# Altium PCB USBSticker01-02.PcbDoc
Units mm, origin at the board's own origin, x right, y up, seen from the top; angles counter-clockwise.
Board outline 22 x 85 mm, 2 copper layers (Top Layer, Bottom Layer); 24 components, 24 nets, 98 pads, 29 vias.
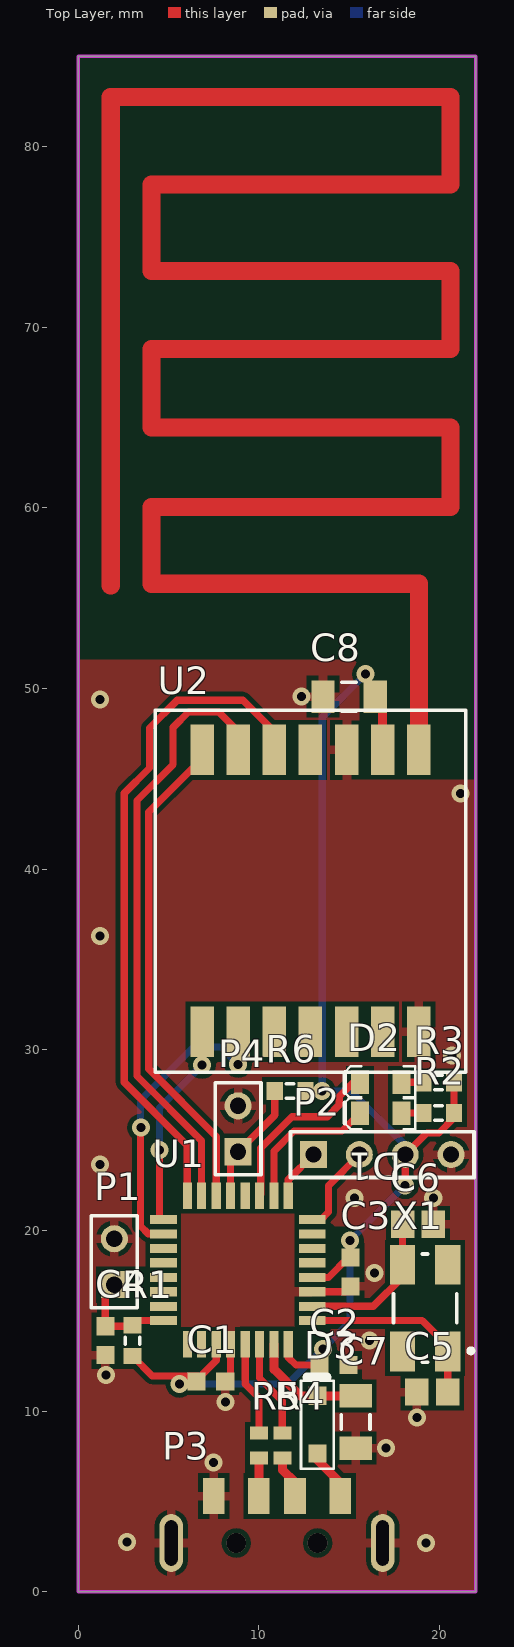
[diagram p0: Top Layer view]
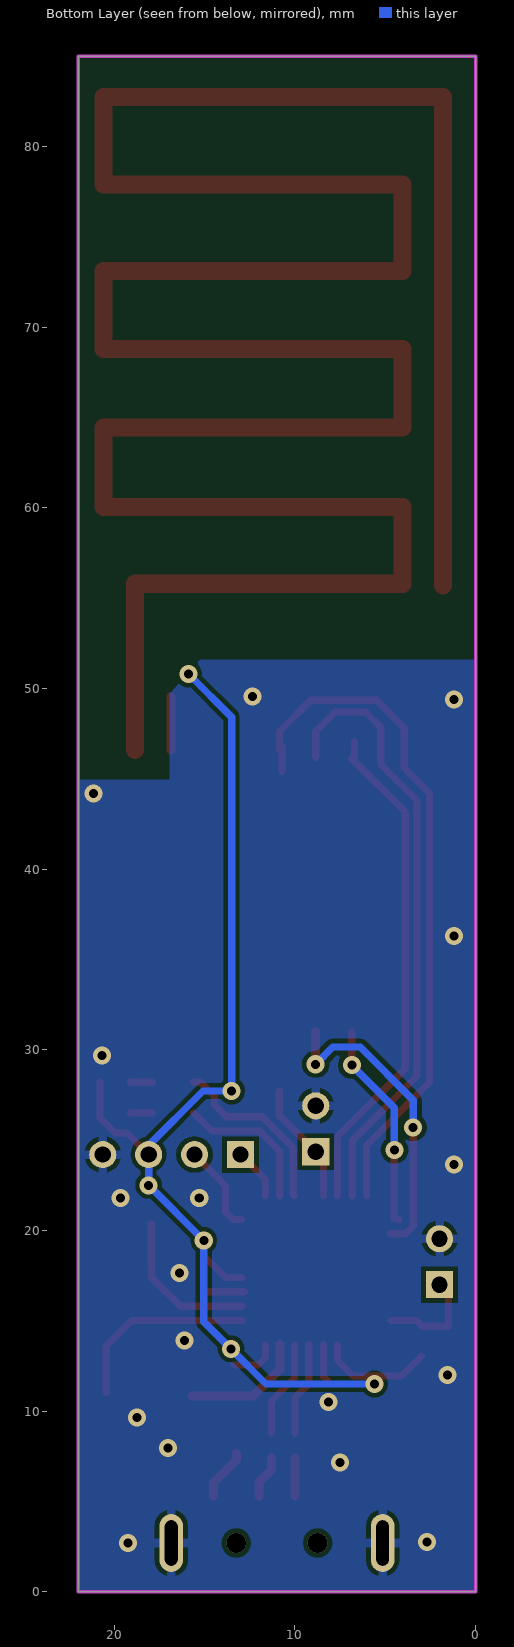
[diagram p1: Bottom Layer view, seen from below]
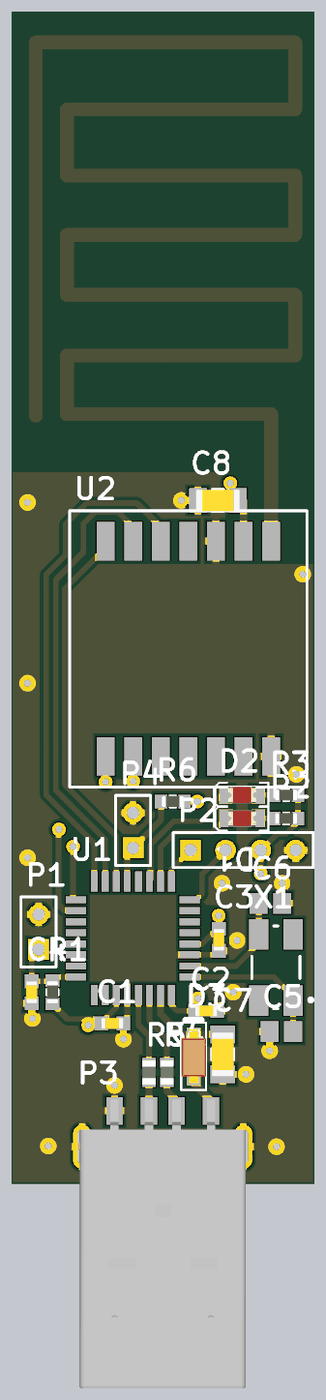
[diagram p2: 3D render of the assembled board from above, using the file's embedded part models]

## Layer stack, top to bottom
Top Solder: solder mask 0.0102, Solder Resist, Dk 3.5
Top Layer: signal copper 0.0356
Dielectric1: dielectric 0.32, FR-4, Dk 4.8
Bottom Layer: signal copper 0.0356
Bottom Solder: solder mask 0.0102, Solder Resist, Dk 3.5

## Board outline
0,0 0,85 22,85 22,0

## Design rules (kind name [scope] priority, off if disabled: settings)
Clearance KeepOut [InPolygon vs OnLayer('Keep-Out Layer')] p1: gap=0.01
Clearance [All] p2: gap=0.25
FabricationTestPointUsage TestPointUsage [All] p1: valid=0 allowmultiple=FALSE
FabricationTestpoint Testpoint [All] p1: side=3 testpointundercomponent=TRUE minsize=1.016 maxsize=2.54 preferedsize=1.524 minholesize=0 maxholesize=1.016 preferedholesize=0.813 testpointgrid=0.025 allowsidetop=TRUE allowsidebottom=TRUE usegrid=TRUE gridtolerance=0
HoleSize [All] p1: absolutevalues=TRUE maxlimit=6 minlimit=0.025 maxpercent=80.000 minpercent=20.000
PolygonConnect PolygonConnect_1 [All vs IsVia] p1: connectstyle=Direct reliefconductorwidth=0.254 reliefentries=4 polygonreliefangle="90 Angle" airgapwidth=0.254
PolygonConnect [All] p2: connectstyle=Relief reliefconductorwidth=0.5 reliefentries=4 polygonreliefangle="90 Angle" airgapwidth=0.254
RoomDefinition USBSticker01-01 [InComponentClass('USBSticker01-01')] p1: confinementstyle=ConfineIn formatcopy=TRUE lockcomponents=FALSE outline -7.25,-15.95 30,-15.95 30,88.3 -7.25,88.3
RoutingVias [All] p1: holewidth=0.711 width=1.27 viastyle="Through Hole" minholewidth=0.711 minwidth=1.27 maxholewidth=0.711 maxwidth=1.27
SilkToSolderMaskClearance SilkscreenOverComponentPads [IsPad] p1 off: minsilkscreentomaskgap=0.254 clearancetoexposedcopper=TRUE
SolderMaskExpansion [All] p1: expansion=0.102
Width [All] p1: maxlimit=2 minlimit=0.25 preferedwidth=0.4
26 further rules are at their usual default settings.

## Components (designator, comment, footprint, x,y, rotation, side; value= is the part's Value field where it differs from the comment)
C1 "1uF" CAPC1608N 7.339,11.65 r180 top
C2 "150nF" CAPC1608N 14.15,12.55 r180 top
C3 "150nF" CAPC1608N 15.073,17.7 r90 top
C4 "10pF" CAPC1608N 1.5,13.9 r90 top
C5 "18pF" CAPC2012N 19.6,11.05 r0 top
C6 "18pF" CAPC2012N 18.804,20.347 r180 top
C7 "10uF" CAPC3216N 15.35,9.4 r90 top (schematic designator C6)
C8 "10uF" CAPC3216N 15,49.55 r0 top
D1 "KPT-2012QBC-D" D0805 16.75,26.5 r180 top
D2 "KPT-2012QBC-D" D0805 16.75,28.199 r180 top
D3 "BAT42W" SOD123 13.25,9.25 r270 top
P1 "Header 2" HDR1X2 2,17 r270 top
P2 "Header 4" HDR1X4 13.02,24.2 r0 top
P3 "48037-2200" "MOLEX 48037-2200" 11,2.7 r0 top
P4 "Header 2" HDR1X2 8.85,24.36 r270 top
R1 "10k" RESC1608N 3,13.9 r270 top
R2 "150R" RESC1608N 19.95,26.5 r0 top
R3 "150R" RESC1608N 19.95,28.199 r0 top
R4 "22R" RESC1608X50N 11.3,8.09 r90 top
R5 "22R" RESC1608X50N 10,8.09 r90 top
R6 "10k" RESC1608N 11.725,27.724 r0 top
U1 "AT90USB162-16AU" QFP80P900X900X120-32N 8.835,17.807 r180 top locked
U2 "ALPHA-TRX433S" ALPHA-TRX 12.854,38.8 r0 top locked
X1 "8 MHz" 2SMX-3SMXB 19.2,15.7 r90 top

## Footprints (in the part's own frame and the unit in brackets; to place one, negate y for a bottom-side part, rotate by r counter-clockwise, add the part's x,y. Pads: shape width x height; smd on the part's side, far side on the other; paste and mask are expansions set on the pad)
2SMX-3SMXB [mm] "Quartz Crystal, SM; Body 6.0 x 3.5 mm (LxW)"
  rect 2.2x1.4 smd: 1(-2.4,-1.25) 2(2.4,-1.25) 3(2.4,1.25) 4(-2.4,1.25)
  silkscreen extent -3,-2.66 3,1.75, body extent -3.01,-1.76 3.01,1.76, height 1
ALPHA-TRX [mm] "ALPHA RF MODULES"
  rect 1.3x2.8 smd: 1(-6,-7.8) 2(-4,-7.8) 3(-2,-7.8) 4(0,-7.8) 5(2,-7.8) 6(4,-7.8) 7(6,-7.8) 8(6,7.8) 9(4,7.8) 10(2,7.8) 11(0,7.8) 12(-2,7.8) 13(-4,7.8) 14(-6,7.8)
  silkscreen extent -8.6,-10.03 8.6,10, body extent -8.05,-7.95 8.05,7.95, height 4
CAPC1608N [mm] "Chip Capacitor, Body 1.6x0.8mm(0603), IPC Medium Density"
  rect 1x1 smd: 1(-0.8,0) 2(0.8,0)
  body extent -0.8,-0.4 0.8,0.4, height 0.55
CAPC2012N [mm] "Chip Capacitor, Body 2.0x1.3mm(C0805), IPC Medium Density"
  rect 1.3x1.5 smd: 1(-0.85,0) 2(0.85,0)
  body extent -1.1,-0.73 1.1,0.73, height 1.1
CAPC3216N [mm] "Chip Capacitor, Body 3.2x1.6mm, IPC Medium Density"
  rect 1.3x1.8 smd: 1(-1.45,0) 2(1.45,0)
  silkscreen extent -0.4,-0.8 0.4,0.8, body extent -1.6,-0.8 1.6,0.8, height 0.7
D0805 [mm]
  rect 1x1.3 smd paste-0.02 mask+0.05: 1(-1.15,0) 2(1.15,0)
  silkscreen extent -1.91,-0.89 2,0.89, body extent -1.01,-0.62 1.01,0.63, height 1.1
HDR1X2 [mm] "Connector; Header; 2 Position"
  rect 1.5x1.5 hole 0.9: 1(0,0)
  round 1.5 hole 0.9: 2(-2.54,0)
  silkscreen extent -3.81,-1.27 1.27,1.27
HDR1X4 [mm] "Connector; Header; 4 Position"
  rect 1.5x1.5 hole 0.9: 1(0,0)
  round 1.5 hole 0.9: 2(2.54,0) 3(5.08,0) 4(7.62,0)
  silkscreen extent -1.27,-1.27 8.89,1.27
"MOLEX 48037-2200" [mm]
  rect 1.2x2 smd: 1(3.5,2.6) 2(1,2.6) 3(-1,2.6) 4(-3.5,2.6)
  oval 1.3x3.2 hole 0.7 slot 2.5 at 90 deg: 4(-5.85,0) 4(5.85,0)
  body extent -6.02,-17.52 6.02,3.43, height 2.25
QFP80P900X900X120-32N [mil]
  rect 58x20 smd paste-1000 mask-1000: 1(-162,110) 2(-162,79) 3(-162,47) 4(-162,16) 5(-162,-16) 6(-162,-47) 7(-162,-79) 17(162,-110) 18(162,-79) 19(162,-47) 20(162,-16) 21(162,16) 22(162,47) 23(162,79) 24(162,110)
  rect 57.99x20 smd paste-1000 mask-1000: 8(-162,-110)
  rect 20x58 smd paste-1000 mask-1000: 9(-110,-162) 10(-79,-162) 11(-47,-162) 12(-16,-162) 13(16,-162) 14(47,-162) 15(79,-162) 16(110,-162) 25(110,162) 26(79,162) 27(47,162) 28(16,162) 29(-16,162) 30(-47,162) 31(-79,162) 32(-110,162)
  body extent -138,-138 138,138, height 39
RESC1608N [mm] "Chip Resistor, Body 1.6x0.8mm, IPC Medium Density"
  rect 0.9x1 smd: 1(-0.85,0) 2(0.85,0)
  silkscreen extent -0.2,-0.4 0.2,0.4, body extent -0.8,-0.4 0.8,0.4, height 0.38
RESC1608X50N [mm] "Chip Resistor, EIA 0603, Metric 1608, Body 1.6x0.8mm, IPC Medium Density"
  rect 0.72x0.99 smd: 1(-0.69,0) 2(0.69,0)
  body extent -0.87,-0.47 0.88,0.48, height 0.5
SOD123 [mm]
  rect 1x1 smd paste-0.02 mask+0.05: 1(1.6,0) 2(-1.6,0)
  silkscreen extent -2.62,-0.91 2.44,0.89, body extent -1.95,-0.9 1.95,0.9, height 1.29

## Part data
C1: library part C0000022, "MLCC, 0603, X6S, 25V, 1uF"
C2 C3: library part C0000001, "MLCC, 150nF 16V -20+80% Y5V"
C4: library part C0000042, "MLCC, 0603, NP0, 50V, 10PF"
C5 C6: library part C0000048, "MLCC, 0805, NPO, 50V, 18pF"
C7 C8: library part C0000011, "MLCC, 10uF 25V -20%, +80% Y5V 1206"
D1 D2: library part D0000005, "LED, SMD, 0805, BLUE, 100mCd"
D3: library part D0000003, "Diode Schottkey, 30V, Vf=1V, If=1A, rrt=5ns, SOD123, -55°C to +125°C"
P1 P4: "Header, 2-Pin"
P2: "Header, 4-Pin"
P3: "SOCKET, USB, PCB, R/A, TYPE A"
R1 R6: library part R0000008, "Res, 10K 0.063W 75V 1%  0603"
R2 R3: library part R2406052, "150R 5% 0603 1/10W"
R4 R5: library part R0000136, "Res, 22R, 0603 (1608 metric), ±1%, 100mW, 75V"
U2: "RF SOLUTIONS  ALPHA-TRX433S  RF MODULE, TRANSCEIVER, FSK, 433MHZ"
X1: library part M0000014, "CRYSTAL, 8M, 18PF CL, 6X3.6MM SMT"

## Via types
v1: diameter 1, hole 0.5, Top Layer to Bottom Layer, 27 vias
v2: diameter 1.1, hole 1.1, Top Layer to Bottom Layer, 2 vias

## Nets (pads, with @x,y where several pads share a name; then routed paths per layer and width w, separated by ;. In a path a pad name is that pad's centre, name@x,y a point inside that pad or via, vN(x,y) a via of type N, cw(c..) or ccw(c..) an arc to the next point about the centre after c; other vN are vias at no path point)
+3.3V: C1.2 C2.2 C3.2 C8.2 P2.3 R1.2 R2.2 R3.2 R6.2 U1.4 U1.27 U1.32 U2.9 | length 73.4
  Top Layer w0.4: R1.2 4.1,11.95 6.787,11.95 7.641,12.804 U1.27 ; U1.32 11.629,12.971 12.05,12.55 C2.2 ; U1.4 13.85,17.4 C3.2@14.95,18.5 ; v1(18.1,22.5) P2.3 19.3,25.4 19.965,25.4 20.8,26.235 R3.2
  Top Layer w0.5: U2.9 C8.2@16.854,49.55
  Bottom Layer w0.4: v1(5.6,11.5) 11.6,11.5 v1(13.55,13.45) 15.05,14.95 v1(15.05,19.45) v1(18.1,22.5) P2.3 18.1,24.718 15.094,27.724 v1(13.503,27.724) 13.503,48.403 v1(15.9,50.8)
+5V: C7.2 D3.2 U1.31 | length 6.8
  Top Layer w0.5: U1.31 10.842,12.308 12.3,10.85 C7.2 C7.2@15.7,10.85
BOOT: P4.1 R6.1 U1.13 | length 6.8
  Top Layer w0.4: U1.13 8.429,23.879 P4.1@8.9,24.35 ; P4.1 10.875,26.385 R6.1
GND: C1.1 C2.1 C3.1 C4.1 C5.1 C6.1 C7.1 C8.1 P1.2 P2.4 P3.4 P4.2 U1.3 U1.28 U2.7 U2.10 | length 4.3
  Top Layer w0.4: C1.1@8.175,11.65 8.429,11.904 U1.28 ; U1.3@12.8,16.613 U1.3 C3.1@14.987,16.613
  other v1: 19.25,2.7 2.7,2.75 7.5,7.15 17.039,7.95 18.75,9.65 8.15,10.5 1.55,12 16.115,13.9 16.394,17.654 15.3,21.8 19.654,21.8 1.2,23.65 20.694,29.691 1.2,36.3 21.15,44.2 1.2,49.4 12.35,49.55
MISO: U1.17 U2.1 | length 11.6
  Top Layer w0.4: U1.17@4.238,20.601 4.491,20.651 4.5,20.66 v1(4.5,24.45) ; v1(6.854,29.15) U2.1
  Bottom Layer w0.4: v1(4.5,24.45) 4.5,26.796 v1(6.854,29.15)
MOSI: U1.16 U2.12 | length 38.6
  Top Layer w0.4: U1.16 6.041,24.709 2.55,28.2 2.55,44.2 3.95,45.6 3.95,47.821 5.479,49.35 9.128,49.35 10.854,47.624 U2.12 ; U2.12@10.704,45.4 U2.12@10.704,46.75
NetC5_2: C5.2 U1.1 X1.1 | length 10.6
  Top Layer w0.4: U1.1 19.037,15.013 20.45,13.6 X1.1 C5.2
NetC6_2: C6.2 U1.2 X1.3 | length 8.6
  Top Layer w0.4: U1.2 16.337,15.8 17.95,17.413 X1.3 17.954,18.104 C6.2
NetD1_1: D1.1 R2.1 | length 1.2
  Top Layer w0.4: D1.1 R2.1
NetD1_2: D1.2 U1.10 | length 8.1
  Top Layer w0.4: U1.10 10.842,24.392 11.95,25.5 14.6,25.5 D1.2
NetD2_1: D2.1 R3.1 | length 1.2
  Top Layer w0.4: D2.1 R3.1
NetD2_2: D2.2 U1.11 | length 10
  Top Layer w0.4: U1.11 10.1,21.992 10.1,24.569 11.831,26.3 13.8,26.3 14.453,26.953 14.453,27.416 15.236,28.199 D2.2
NetD3_1: D3.1 P3.1 | length 2.9
  Top Layer w0.5: D3.1 13.25,7.287 14.5,6.037 P3.1
NetE1_1: U2.8 | length 179.6
  Top Layer w1: 1.8,55.7 1.8,82.75 20.6,82.75 20.6,77.9 4.05,77.9 4.05,73.1 20.6,73.1 20.6,68.8 4.05,68.8 4.05,64.45 20.6,64.45 20.6,60.05 4.05,60.05 4.05,55.8 18.854,55.8 U2.8
NetP3_2: P3.2 R4.1 | length 2.4
  Top Layer w0.5: R4.1 11.3,6.75 12,6.05 P3.2
NetP3_3: P3.3 R5.1 | length 2.1
  Top Layer w0.5: P3.3 R5.1
NIRQ: U1.18 U2.2 | length 17.2
  Top Layer w0.4: v1@3.45,25.7 3.45,20.244 3.881,19.813 U1.18
  Top Layer w0.5: v1(8.854,29.2) U2.2
  Bottom Layer w0.4: v1@3.45,25.7 3.45,27.213 6.387,30.15 7.904,30.15 v1(8.854,29.2)
  other v1: 3.475,25.7
NSEL: U1.14 U2.14 | length 27.9
  Top Layer w0.4: U2.14@6.704,46.116 U2.14@6.704,47.05 ; U2.14@6.854,46.116 3.9,43.162 3.9,28.95 7.641,25.209 U1.14
RST: C4.2 P1.1 R1.1 U1.24 | length 5.9
  Top Layer w0.4: P1.1 1.5,16.5 C4.2 2.95,14.7 R1.1 3.263,15.013 U1.24
SCK: U1.15 U2.13 | length 34.1
  Top Layer w0.4: U1.15 6.829,24.971 3.25,28.55 3.25,43.796 5.254,45.8 5.254,47.85 6.104,48.7 7.779,48.7 8.854,47.625 U2.13 U2.13@8.854,46.2
USART_RX: P2.2 U1.8 | length 5
  Top Layer w0.4: U1.8 13.433,20.601 13.85,21.018 13.85,22.48 P2.2@15.57,24.2
USART_TX: P2.1 U1.9 | length 2.9
  Top Layer w0.4: U1.9 11.629,22.809 P2.1
USB_D+: R5.2 U1.29 | length 5.2
  Top Layer w0.4: U1.29 9.242,11.508 10,10.75 R5.2
USB_D-: R4.2 U1.30 | length 5.4
  Top Layer w0.4: U1.30 10.029,11.836 11.3,10.565 R4.2@11.3,8.8
pads on no net: U1.5 U1.6 U1.7 U1.12 U1.19 U1.20 U1.21 U1.22 U1.23 U1.25 U1.26 U2.3 U2.4 U2.5 U2.6 U2.11 X1.2 X1.4
copper on no net:
  other v2: 8.75,2.7 13.25,2.7

## Polygon pours and split planes (outlines as drawn)
GND on Top Layer "Top Layer GND" (solid, remove dead copper, pour order 0): 0,0 0,51.6 15.25,51.6 16.927,49.719 16.927,44.95 22,44.95 22,0
GND on Bottom Layer "Bottom Layer GND" (solid, remove dead copper, pour order 2): 0,0 0,51.6 15.25,51.6 16.927,49.719 16.927,44.941 22,44.941 22,0

## Keep-outs
Keep-Out Layer:
  the board outline again, w0.2

## Other copper
Top Layer:
  pour cut-out: 13.754,48.25 13.754,44.95 5.688,44.95 6.854,46.6 8.854,46.6 9.637,48.25
  pour cut-out: 9.15,4.05 15.35,4.05 15.35,6.55 9.15,6.55
  pour cut-out: 9.255,9.39 10.425,9.39 14.15,9.95 14.15,8.85 13.25,7.65 9.255,6.55
  pour cut-out: 21.4,19.45 21.4,14.65 20.049,14.65 20.049,16.001 17.95,18.1
  pour cut-out: 3,18 4.121,18 4.72,17.4 4.32,17 2,17
  pour cut-out: 13.936,20.456 14.186,20.206 15.05,20.206 15.05,19.45
  pour cut-out: 13.937,14.509 13.937,13.837 13.55,13.45
  pour cut-out: 18.1,25.209 18.1,26.899 18.4,28.949 21.5,28.949 21.5,27.899 21.5,25.75 20.964,25.75 20.423,25.209
  pour cut-out: 16.35,25.6 16.35,24.277 15.6,23.527 15.6,26.5
  pour cut-out: 5.954,32.65 17.754,32.65 17.754,29.35 5.954,29.35
  pour cut-out: 11.55,28.474 11.875,28.474 11.875,28.255 11.725,28.105 11.55,28.333
  pour cut-out: 15.55,48.55 15.55,44.95 16.927,44.95 16.927,46.527 16.854,46.6 17.1,46.846 17.1,48.55

## Silkscreen, mask and mechanical layers (free items; w line width, h text height)
Bottom Overlay:
  text ".Legend" at -24.419,-43.319 h2
Mechanical 2:
  text ".Layer_Name" at -24.344,-46.323 h0.75
Mechanical 16:
  lines w0.127: -89.697,-19.824 -84.617,-19.824 ; -89.697,28.436 -84.617,28.436 ; -89.697,76.696 -84.617,76.696 ; -16.672,-68.084 -16.672,-63.004 ; -16.672,119.876 -16.672,124.956 ; 56.353,119.876 56.353,124.956 ; 83.023,-55.384 197.323,-55.384 ; 83.023,-47.764 197.323,-47.764 ; 83.023,-40.144 121.123,-40.144 ; 121.123,-63.004 121.123,-47.764 121.123,-32.524 ; 129.378,-68.084 129.378,-63.004 ; 129.378,119.876 129.378,124.956 ; 174.463,-63.004 174.463,-47.764 ; 197.323,-19.824 202.403,-19.824 ; 197.323,76.696 202.403,76.696 ; 83.023,-63.004 47.463,-63.004 47.463,-32.524 83.023,-32.524 ; 83.023,-63.004 197.323,-63.004 ; 83.023,-63.004 83.023,-32.524 ; 83.023,-32.524 121.123,-32.524 ; 121.123,-32.524 197.323,-32.524 197.323,-63.004 ; 197.323,-63.004 -84.617,-63.004 -84.617,119.876 197.323,119.876 197.323,-63.004 ; -89.697,-68.084 202.403,-68.084 202.403,124.956 -89.697,124.956 -89.697,-68.084
  text "1" at -53.451,121.527 h1.78
  text "2" at 19.193,121.527 h1.78
  text "3" at 92.345,121.527 h1.78
  text "4" at 165.243,121.527 h1.78
  text "A" at -87.792,98.515 h1.78
  text "A" at 199.228,98.515 h1.78
  text "B" at -87.792,50.458 h1.78
  text "B" at 199.228,50.458 h1.78
  text "C" at -87.792,1.944 h1.78
  text "C" at 199.228,1.944 h1.78
  text "TITLE" at 125.695,-29.222 h1.52
  text "ENGINEER:" at 84.293,-35.064 h1.14
  text "TITLE:" at 122.393,-35.064 h1.14
  text "Engineer" at 106.211,-38.239 h2.5
  text "PCB DESIGNER:" at 84.293,-42.557 h1.14
  text "D" at -87.792,-46.062 h1.78
  text "D" at 199.228,-46.062 h1.78
  text "PCB designer" at 101.358,-46.113 h2.5
  text "DATE:" at 84.293,-50.304 h1.14
  text "PART NO.:" at 122.393,-50.304 h1.14
  text "REV:" at 175.733,-50.304 h1.14
  text ".VariantName" at 132.807,-52.717 h1.52
  text ".PRINT_DATE" at 101.043,-53.606 h2.5
  text "FILE NAME:" at 84.293,-57.924 h1.14
  text "DWG NO:" at 122.393,-57.924 h1.14
  text "SCALE:" at 175.733,-57.924 h1.14
  text ".Printout_Name" at 132.807,-60.337 h1.52
  text ".Print_Scale" at 181.829,-60.337 h1.52
  text ".PCB_FILE_NAME_NO_PATH" at 84.928,-61.226 h2.5
  text "1" at -53.451,-66.433 h1.78
  text "2" at 19.193,-66.433 h1.78
  text "3" at 92.345,-66.433 h1.78
  text "4" at 165.243,-66.433 h1.78
Drill Drawing:
  text ".Legend" at -24.344,-48.323 h0.75

## Dimensions
0,0 to 22,0 on Mechanical 3
22,0 to 22,85 on Mechanical 3